# EAGLE board HiveBoard Dimension (EAGLE 9.6.2), part 1 of 2
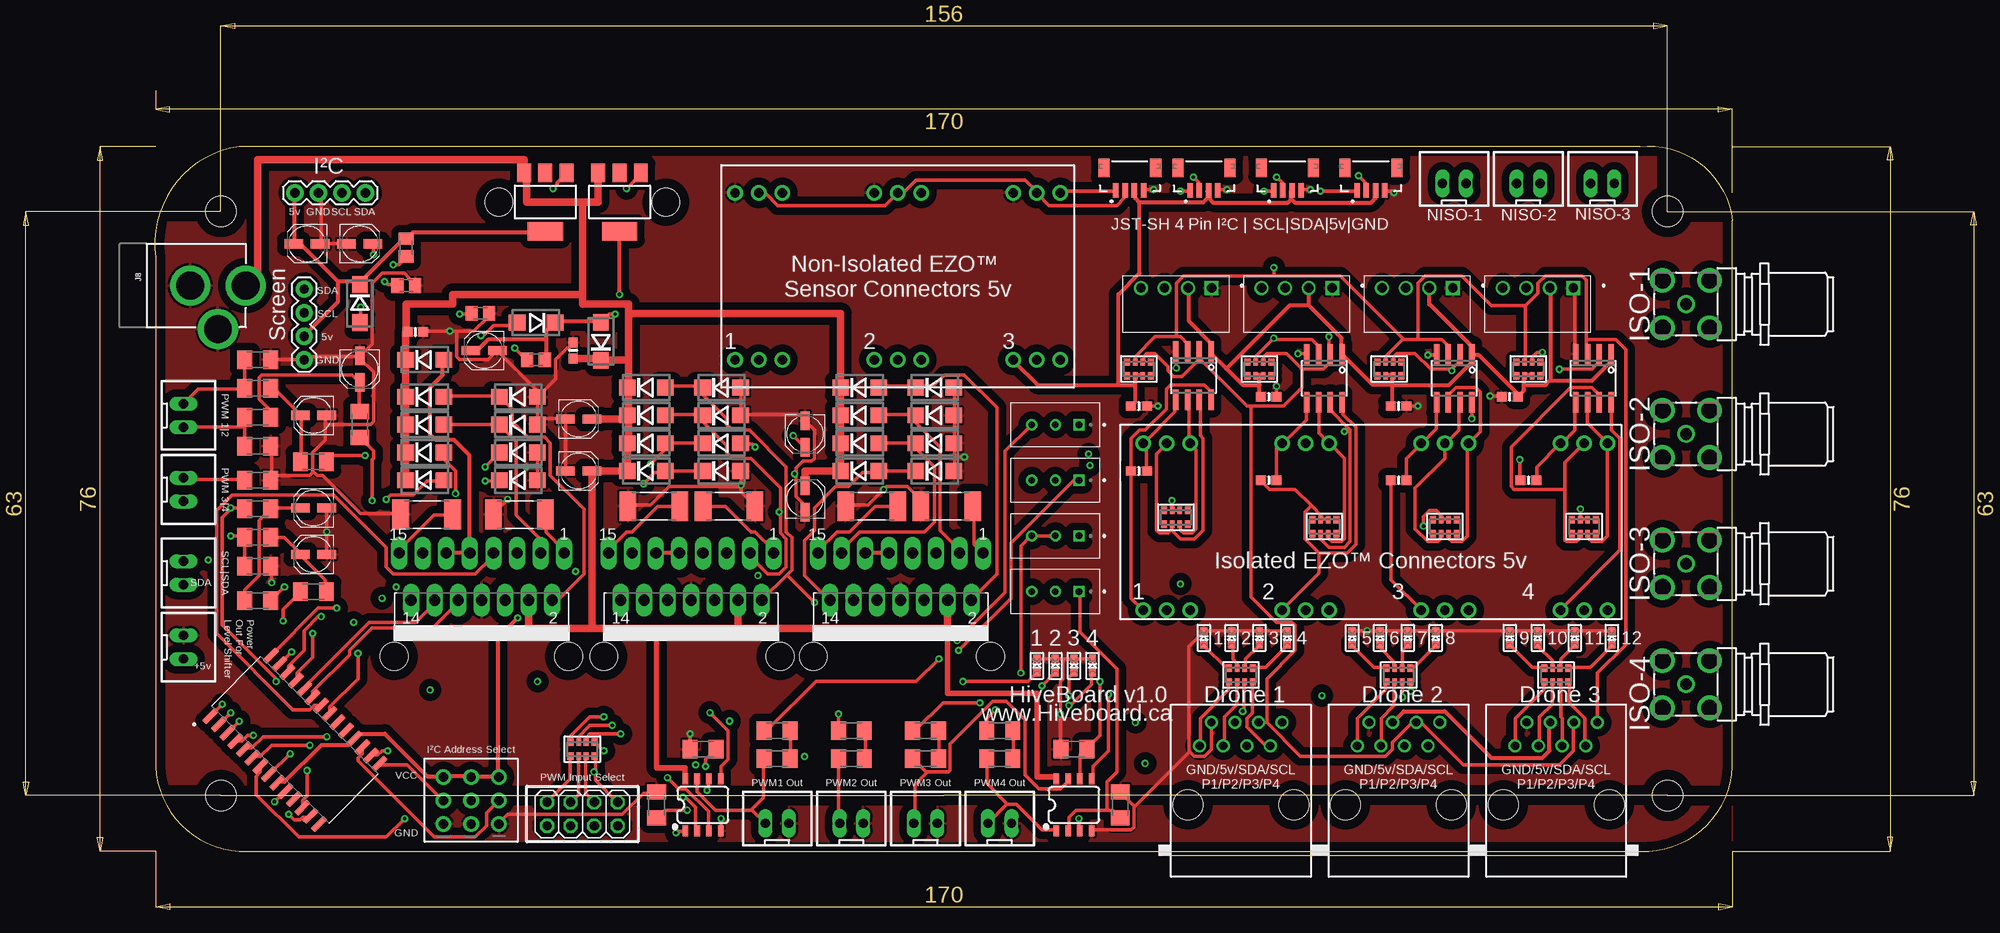
[diagram p0: board, top side]
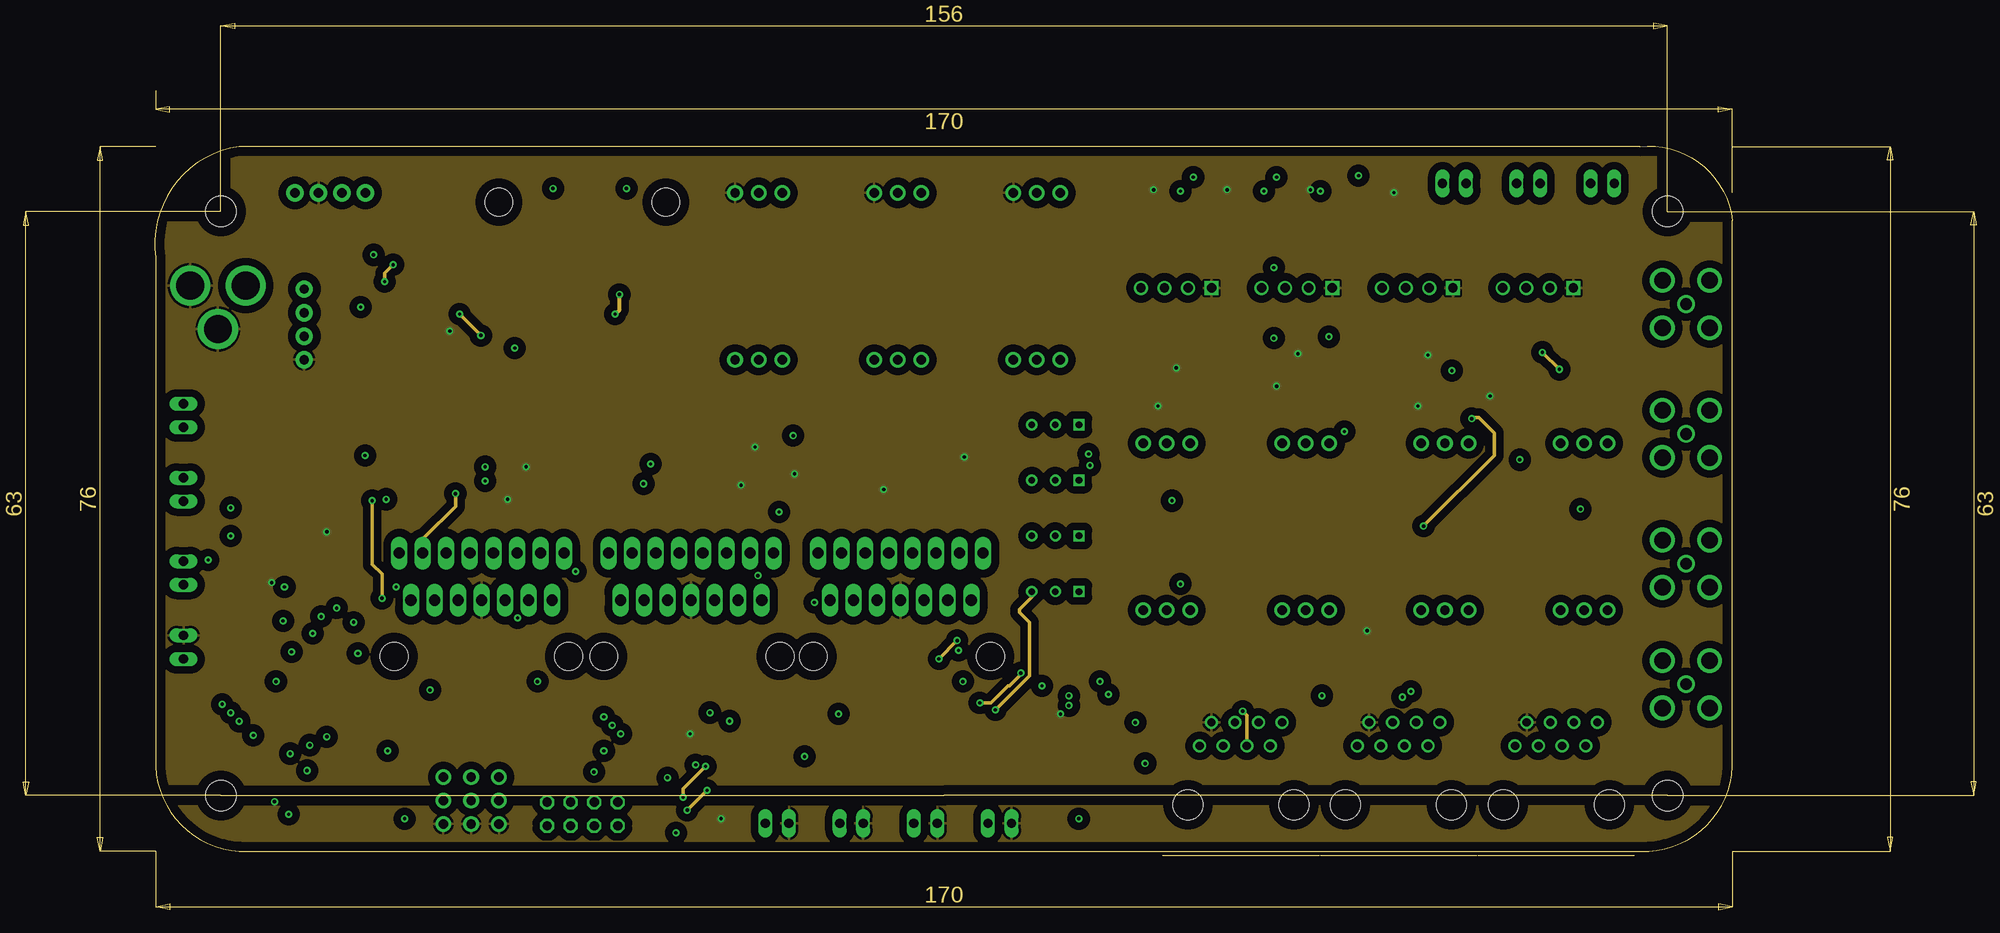
[diagram p1: board, inner layer Route2]
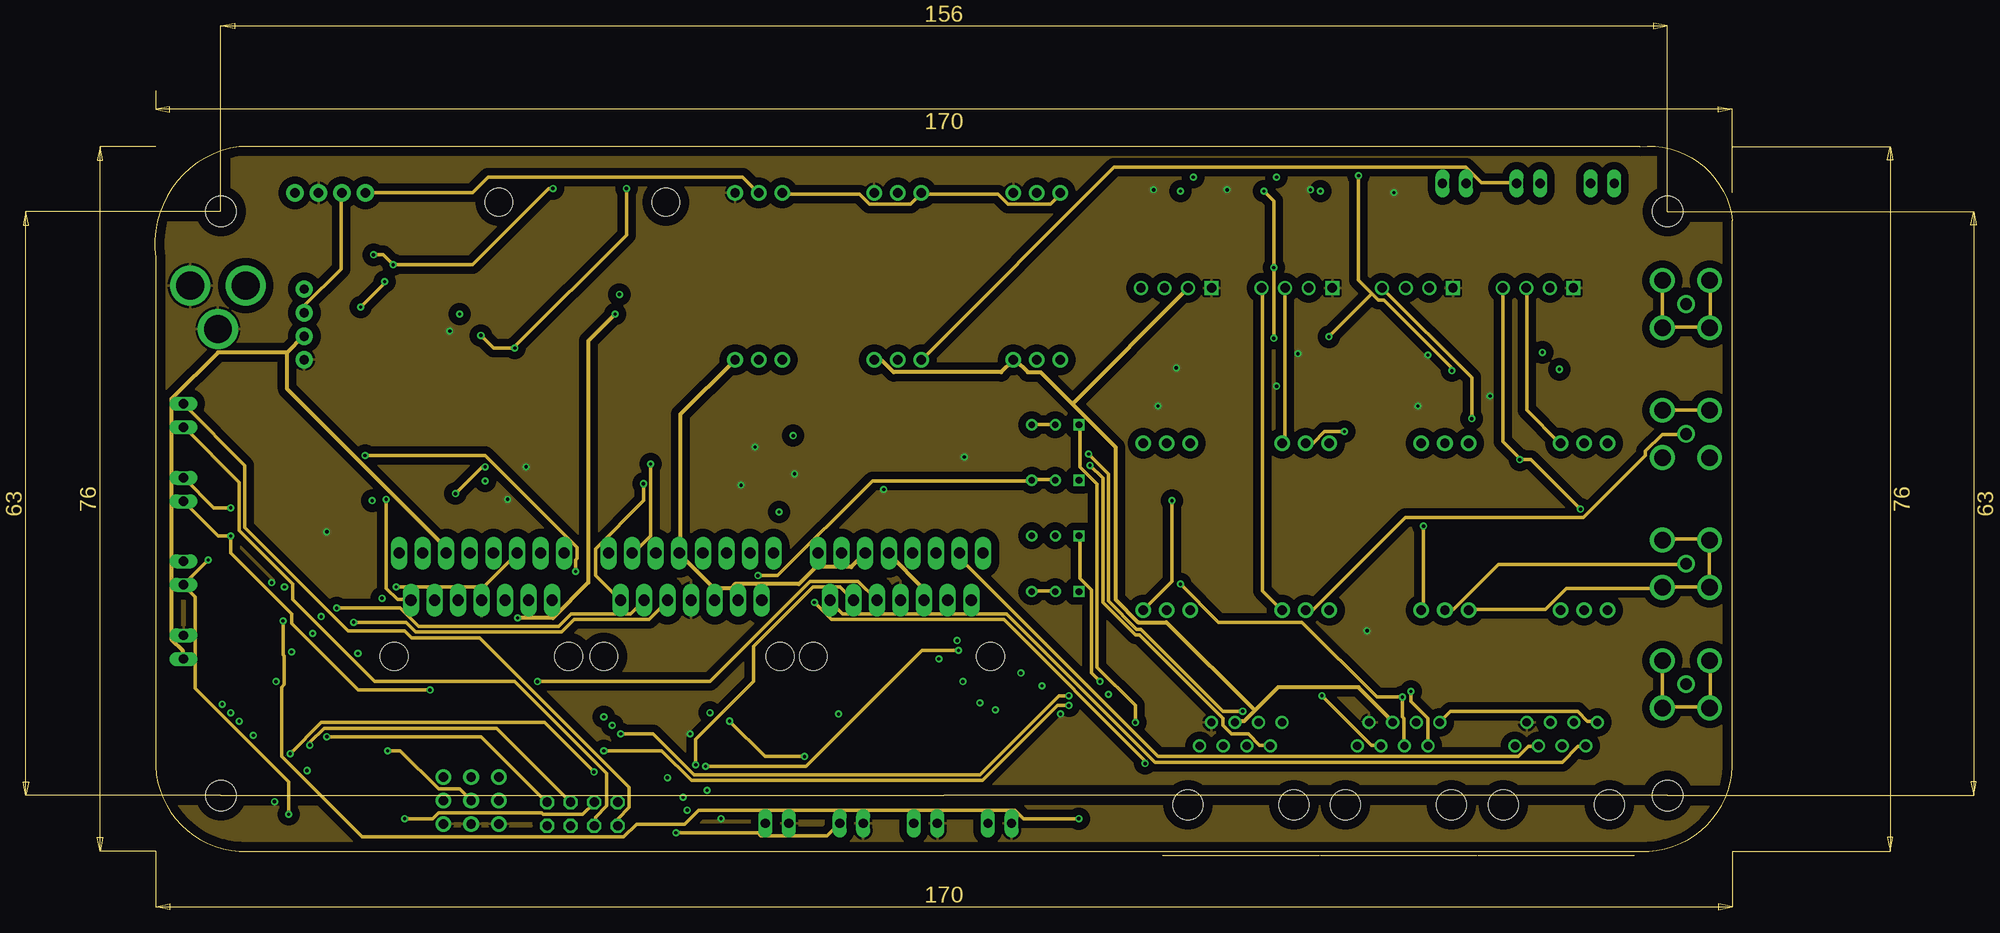
[diagram p2: board, inner layer Route15]
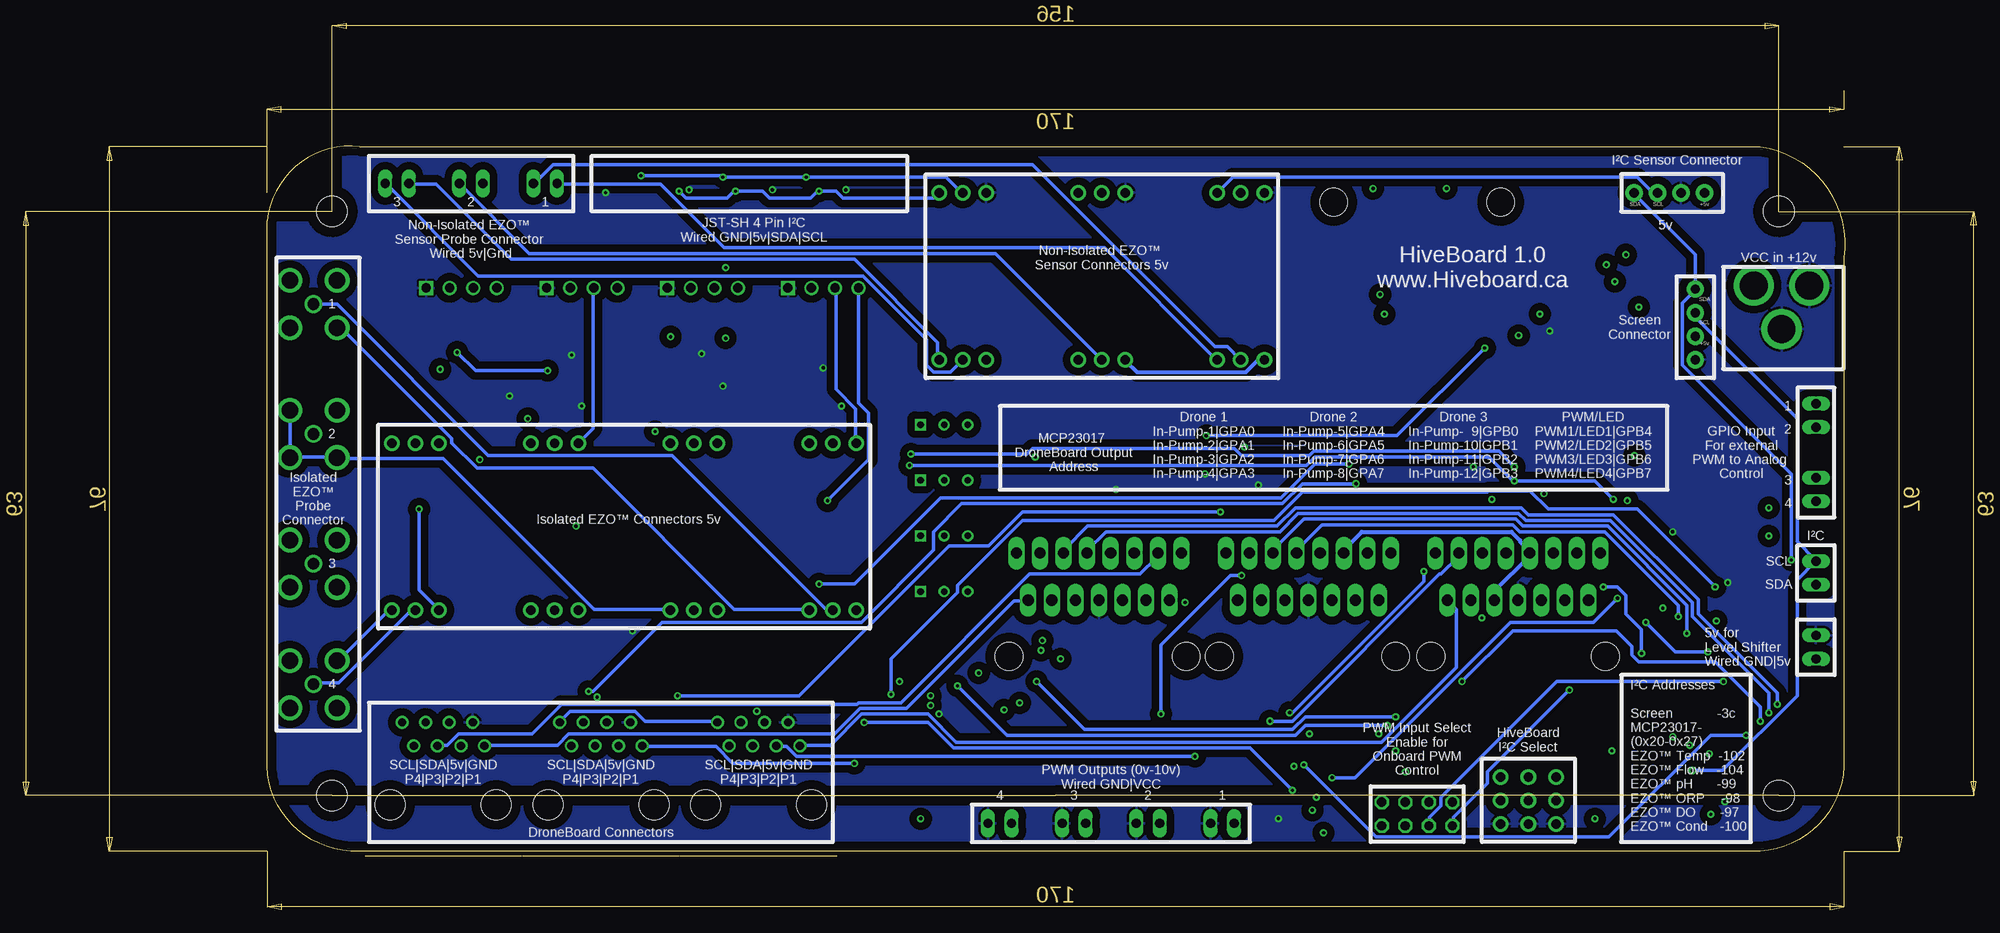
[diagram p3: board, bottom side, seen from below]

Size 170.1 x 76.05 mm. Coordinates in mm from the lower left corner, seen from the top.
Outline: 9.1,0 161.1,0 arc90 170.1,10 170.1,68 arc90 160.1,76 9.1,76 arc90 0.1,64 0.1,10 arc90 9.1,0
Copper layers (1+2*15+16): Top 0.035mm / dielectric 1.5mm / Route2 0.035mm / dielectric 0.15mm / Route15 0.035mm / dielectric 0.2mm / Bottom 0.035mm
Design rules "default *": minimum track width 6mil, minimum drill 0.35mm, track to track 6mil, track to pad 6mil, pad to pad 6mil, via to via 6mil, smd to smd 6mil, copper to edge 40mil, drill to drill 6mil, minimum pad ring 10mil, minimum via ring 8mil, stop-mask expansion 4mil, vias tented up to drill 0mil, thermal gap 10mil
Net classes: 0 default: width 0.356 mm, drill 0.102 mm, clearance 0.254 mm; 1 highpower: width 0.356 mm, drill 0.356 mm; 2 12v: width 0.457 mm, drill 0.102 mm, clearance 0.254 mm; 3 5v: width 0.406 mm, drill 0.102 mm, clearance 0.254 mm; 4 3.3v: width 0.406 mm, drill 0.102 mm, clearance 0.254 mm; 5 i2c: width 0.356 mm, drill 0.102 mm, clearance 0.254 mm; 6 GPIO: width 0.356 mm, drill 0.102 mm, clearance 0.254 mm; 8 New Class: drill 0.102 mm, clearance 0.152 mm
Holes 3 mm at 55.1,70 37.1,70 48.4,21 67.4,21 71,21 90.1,21 25.8,21 44.6,21

## Footprints (pad centres in the part's own frame; a part is rotated, then mirrored left to right if it is on the bottom)
UD-4X5,8_NICHICON = smd 2 x 1: + 1.425,0; - -1.425,0
0603-NO = smd 1.075 x 1: 1 -0.85,0; 2 0.85,0
DO214BA = smd 1.8 x 1.7: A 2.05,0; C -2.05,0
STAND-OFF = hole 3.302: 0,0
SOT223 = smd 1.5 x 2: 1 -2.3,-3.15; 2 0,-3.15; 3 2.3,-3.15 | smd 3.8 x 2: 4 0,3.15
MULTIWATT-15 = drill 1.2 long: 1 -8.89,-7.62; 2 -7.62,-2.54; 3 -6.35,-7.62; 4 -5.08,-2.54; 5 -3.81,-7.62; 6 -2.54,-2.54; 7 -1.27,-7.62; 8 0,-2.54; 9 1.27,-7.62; 10 2.54,-2.54; 11 3.81,-7.62; 12 5.08,-2.54; 13 6.35,-7.62; 14 7.62,-2.54; 15 8.89,-7.62
JST04_1MM_VERT = smd 0.6 x 1.55: 1 -1.478,0.775; 2 -0.478,0.775; 3 0.522,0.775; 4 1.522,0.775 | smd 1.2 x 2: NC1 -2.778,3.2; NC2 2.822,3.2
1X04 = drill 1.016 pad 1.88: 1 0,0; 2 2.54,0; 3 5.08,0; 4 7.62,0
POWER_JACK_PTH = drill 2.997 pad 4.318: GND 0,7.7; GNDBREAK 4.7,10.7; PWR 0,13.7
1X03_ROUND = drill 1 pad 1.676: 1 -2.54,0; 2 0,0; 3 2.54,0
2X04 = drill 1.016 octagon: 1 -3.81,-1.27; 2 -3.81,1.27; 3 -1.27,-1.27; 4 -1.27,1.27; 5 1.27,-1.27; 6 1.27,1.27; 7 3.81,-1.27; 8 3.81,1.27
1X03-CLEANBIG = drill 1.016 pad 1.676: 1 -2.54,0; 2 0,0; 3 2.54,0
CHIPLED_0603 = smd 0.8 x 0.8: A 0,-0.75; C 0,0.75
CONV_RFM-0505S = drill 1 square: 1 -3.85,-1.75 | drill 1: 2 -1.31,-1.75; 3 1.23,-1.75; 4 3.77,-1.75
R2512 = smd 1.8 x 3.2: 1 -2.8,0; 2 2.8,0
M1206 = smd 1.6 x 2: 1 -1.4,0; 2 1.4,0
M0805 = smd 1.3 x 1.6: 1 -0.95,0; 2 0.95,0
TRIM_3296W-1-103 = drill 0.71 square: 1 -2.54,0 | drill 0.71: 2 0,0; 3 2.54,0
RESPACK_4X0603 = smd 0.65 x 0.8: 1 -1.3,-0.75; 4 1.3,-0.75; 5 1.3,0.75; 8 -1.3,0.75 | smd 0.5 x 0.8: 2 -0.4,-0.75; 3 0.4,-0.75; 6 0.4,0.75; 7 -0.4,0.75
SOIC127P1030X265-28N = smd 1.9 x 0.6: 1 -4.605,8.255; 2 -4.605,6.985; 3 -4.605,5.715; 4 -4.605,4.445; 5 -4.605,3.175; 6 -4.605,1.905; 7 -4.605,0.635; 8 -4.605,-0.635; 9 -4.605,-1.905; 10 -4.605,-3.175; 11 -4.605,-4.445; 12 -4.605,-5.715; 13 -4.605,-6.985; 14 -4.605,-8.255; 15 4.605,-8.255; 16 4.605,-6.985; 17 4.605,-5.715; 18 4.605,-4.445; 19 4.605,-3.175; 20 4.605,-1.905; 21 4.605,-0.635; 22 4.605,0.635; 23 4.605,1.905; 24 4.605,3.175; 25 4.605,4.445; 26 4.605,5.715; 27 4.605,6.985; 28 4.605,8.255
SO08 = smd 0.6 x 1.2: 1 -1.905,-2.8; 2 -0.635,-2.8; 3 0.635,-2.8; 4 1.905,-2.8; 5 1.905,2.8; 6 0.635,2.8; 7 -0.635,2.8; 8 -1.905,2.8
JST-XH-02-PACKAGE-LONG-PAD = drill 1.016 long: 1 -1.27,0; 2 1.27,0
SOIC8_150MIL = smd 0.6 x 2.2: 1 -1.905,-2.6; 2 -0.635,-2.6; 3 0.635,-2.6; 4 1.905,-2.6; 5 1.905,2.6; 6 0.635,2.6; 7 -0.635,2.6; 8 -1.905,2.6
RJ45-NO-SHIELD = drill 0.9 pad 1.4: 1 -4.445,6.35; 2 -3.175,8.89; 3 -1.905,6.35; 4 -0.635,8.89; 5 0.635,6.35; 6 1.905,8.89; 7 3.175,6.35; 8 4.445,8.89 | hole 3.251: -5.715,0; 5.715,0
BU-SMA-G = drill 1.27: 1 0,0 | drill 1.778: 2 -2.55,2.55; 3 2.55,2.55; 4 2.55,-2.55; 5 -2.55,-2.55

## Placement (x,y rotation side)
C1  100nF  [UD-4X5,8_NICHICON]  45.7,41 0 top
C1A1  1uf 50v  [UD-4X5,8_NICHICON]  17.1,47 180 top
C1A2  1uf 50v  [UD-4X5,8_NICHICON]  17.1,37 180 top
C1B1  1uf 50v  [UD-4X5,8_NICHICON]  22.1,52 270 top
C1B2  1uf 50v  [UD-4X5,8_NICHICON]  17.1,32 180 top
C2  0.1uF  [0603-NO]  28.1,56 180 top
C3  1uF 50v  [UD-4X5,8_NICHICON]  16.4,65.5 180 top
C4  10uF 35v  [UD-4X5,8_NICHICON]  22.1,65.5 0 top
C5  1uf 50v  [UD-4X5,8_NICHICON]  35.5,54 180 top
C6  0.1uF  [0603-NO]  45.1,54 270 top
C7  100nF  [UD-4X5,8_NICHICON]  45.7,46.6 0 top
C8  10uF 35v  [UD-4X5,8_NICHICON]  70.1,45 270 top
C9  100nF  [UD-4X5,8_NICHICON]  70.1,38 90 top
C10  0.1uF  [0603-NO]  106.1,48 0 top
C11  0.1uF  [0603-NO]  106.1,41 0 top
C12  0.1uF  [0603-NO]  120.1,49 0 top
C13  0.1uF  [0603-NO]  120.1,40 0 top
C14  0.1uF  [0603-NO]  134.1,48 0 top
C15  0.1uF  [0603-NO]  134.1,40 0 top
C16  0.1uF  [0603-NO]  146.1,49 180 top
C17  0.1uF  [0603-NO]  148.1,40 0 top
D1  1N4002  [DO214BA]  22.1,59.05 270 top
D2  1N4002  [DO214BA]  29.1,53 0 top
D3  1N4004  [DO214BA]  29.1,49 0 top
D4  1N4004  [DO214BA]  39.2,49 0 top
D5  1N4004  [DO214BA]  29.1,46 0 top
D6  1N4004  [DO214BA]  39.2,46 0 top
D7  1N4004  [DO214BA]  29.1,43 0 top
D8  1N4004  [DO214BA]  39.2,43 0 top
D9  1N4004  [DO214BA]  29.1,40 0 top
D10  1N4004  [DO214BA]  39.2,40 0 top
D11  1N4004  [DO214BA]  41.1,57 180 top
D12  1N4004  [DO214BA]  48.1,55 90 top
D13  1N4004  [DO214BA]  53,50 0 top
D14  1N4004  [DO214BA]  53,47 0 top
D15  1N4004  [DO214BA]  53,44 0 top
D16  1N4004  [DO214BA]  53,41 0 top
D17  1N4004  [DO214BA]  61.1,50 0 top
D18  1N4004  [DO214BA]  61.1,47 0 top
D19  1N4004  [DO214BA]  61.1,44 0 top
D20  1N4004  [DO214BA]  61.1,41 0 top
D21  1N4004  [DO214BA]  76,50 0 top
D22  1N4004  [DO214BA]  84.1,50 0 top
D23  1N4004  [DO214BA]  76,47 0 top
D24  1N4004  [DO214BA]  84.1,47 0 top
D25  1N4004  [DO214BA]  76,44 0 top
D26  1N4004  [DO214BA]  84.1,44 0 top
D27  1N4004  [DO214BA]  76,41 0 top
D28  1N4004  [DO214BA]  84.1,41 0 top
H1  STAND-OFF  [STAND-OFF]  7.1,69 0 top
H2  STAND-OFF  [STAND-OFF]  7.1,6 0 top
H3  STAND-OFF  [STAND-OFF]  163.1,69 0 top
H4  STAND-OFF  [STAND-OFF]  163.1,6 0 top
IC1  LM317MBSTT3  [SOT223]  42.1,70 180 top
IC2  L298  [MULTIWATT-15]  35.23,24.52 180 top
IC3  LM317MBSTT3  [SOT223]  50.1,70 180 top
IC4  L298  [MULTIWATT-15]  57.82,24.52 180 top
IC5  L298  [MULTIWATT-15]  80.41,24.52 180 top
J1  Vertical Qwiic Connector  [JST04_1MM_VERT]  105.1,70.5 0 top
J2  C2886705  [1X04]  15.1,71 0 top
J3  C2886705  [1X04]  16.1,53 90 top
J5  Vertical Qwiic Connector  [JST04_1MM_VERT]  113.1,70.5 0 top
J6  Vertical Qwiic Connector  [JST04_1MM_VERT]  122.1,70.5 0 top
J7  Vertical Qwiic Connector  [JST04_1MM_VERT]  131.1,70.5 0 top
J8  POWER_JACK  [POWER_JACK_PTH]  -3.9,61 270 top
JP1  [1X03_ROUND]  31.1,5.46 90 top
JP2  [1X03_ROUND]  34.1,5.46 90 top
JP3  [1X03_ROUND]  37.1,5.46 90 top
JP4  [2X04]  46.1,4 0 top
JP5  C2886705  [1X03-CLEANBIG]  65.1,71 180 top
JP6  C2886705  [1X03-CLEANBIG]  65.1,53 0 top
JP7  C2886705  [1X03-CLEANBIG]  80.1,71 180 top
JP8  C2886705  [1X03-CLEANBIG]  80.1,53 0 top
JP9  C2886705  [1X03-CLEANBIG]  95.1,71 180 top
JP10  C2886705  [1X03-CLEANBIG]  95.1,53 0 top
JP12  C2886705  [1X03-CLEANBIG]  109.1,44 180 top
JP13  C2886705  [1X03-CLEANBIG]  109.1,26 0 top
JP14  C2886705  [1X03-CLEANBIG]  124.1,44 180 top
JP15  C2886705  [1X03-CLEANBIG]  124.1,26 0 top
JP16  C2886705  [1X03-CLEANBIG]  139.1,44 180 top
JP17  C2886705  [1X03-CLEANBIG]  139.1,26 0 top
JP18  C2886705  [1X03-CLEANBIG]  154.1,44 180 top
JP19  C2886705  [1X03-CLEANBIG]  154.1,26 0 top
LED1  [CHIPLED_0603]  95.1,20 0 top
LED2  [CHIPLED_0603]  97.1,20 0 top
LED3  [CHIPLED_0603]  99.1,20 0 top
LED4  [CHIPLED_0603]  101.1,20 0 top
LED5  [CHIPLED_0603]  113.1,23 0 top
LED6  [CHIPLED_0603]  116.1,23 0 top
LED7  [CHIPLED_0603]  119.1,23 0 top
LED8  [CHIPLED_0603]  122.1,23 0 top
LED9  [CHIPLED_0603]  129.1,23 0 top
LED10  [CHIPLED_0603]  132.1,23 0 top
LED11  [CHIPLED_0603]  135.1,23 0 top
LED12  [CHIPLED_0603]  138.1,23 0 top
LED13  [CHIPLED_0603]  146.1,23 0 top
LED14  [CHIPLED_0603]  149.1,23 0 top
LED15  [CHIPLED_0603]  153.1,23 0 top
LED16  [CHIPLED_0603]  157.1,23 0 top
PS1  RFM-0505S  [CONV_RFM-0505S]  110.1,59 180 top
PS2  RFM-0505S  [CONV_RFM-0505S]  123.1,59 180 top
PS3  RFM-0505S  [CONV_RFM-0505S]  136.1,59 180 top
PS4  RFM-0505S  [CONV_RFM-0505S]  149.1,59 180 top
R1  0,5 x 2W  [R2512]  39.3,36.3 0 top
R1A1  100kΩ  [M1206]  11.1,49.91 180 top
R1A2  100kΩ  [M1206]  11.1,36.93 180 top
R1B1  100kΩ  [M1206]  11.1,46.81 0 top
R1B2  100kΩ  [M1206]  11.1,33.86 0 top
R2  240Ω  [M0805]  27.1,65.1 90 top
R2A1  100kΩ  [M1206]  54.1,5 270 top
R2A2  100kΩ  [M1206]  99.1,11 0 top
R2B1  100kΩ  [M1206]  59.1,11 180 top
R2B2  100kΩ  [M1206]  104.1,5 90 top
R3  240Ω  [M0805]  41.1,53 0 top
R3-1A1  3296W-1-103  [TRIM_3296W-1-103]  97.1,46 180 top
R3-1A2  3296W-1-103  [TRIM_3296W-1-103]  97.1,34 180 top
R3-1B1  3296W-1-103  [TRIM_3296W-1-103]  97.1,40 180 top
R3-1B2  3296W-1-103  [TRIM_3296W-1-103]  97.1,28 180 top
R3-2A1  180KΩ  [M1206]  67.1,13 0 top
R3-2A2  180KΩ  [M1206]  83.1,13 0 top
R3-2B1  180KΩ  [M1206]  75.1,13 0 top
R3-2B2  180KΩ  [M1206]  91.1,13 0 top
R3-3A1  15kΩ  [M1206]  67.1,10 180 top
R3-3A2  15kΩ  [M1206]  83.1,10 180 top
R3-3B1  15kΩ  [M1206]  75.1,10 180 top
R3-3B2  15kΩ  [M1206]  91.1,10 180 top
R4  720Ω  [M0805]  27.1,61 180 top
R4A1  75kΩ  [M1206]  11.1,27 0 top
R4A2  75kΩ  [M1206]  17.1,42 0 top
R4B1  75kΩ  [M1206]  22.1,46 270 top
R4B2  75kΩ  [M1206]  17.1,28 180 top
R5  394Ω  [M0805]  35.1,58 180 top
R5A1  10kΩ  [M1206]  11.1,53 0 top
R5A2  10kΩ  [M1206]  11.1,40 0 top
R5B1  10kΩ  [M1206]  11.1,43.69 0 top
R5B2  10kΩ  [M1206]  11.1,30.73 0 top
R6  0,5 x 2W  [R2512]  29.3,36.3 0 top
R7  10kΩ  [RESPACK_4X0603]  46.1,11 0 top
R8  0,5 x 2W  [R2512]  53.8,37.2 0 top
R9  0,5 x 2W  [R2512]  61.9,37.2 180 top
R10  0,5 x 2W  [R2512]  77.3,37.2 0 top
R11  0,5 x 2W  [R2512]  85.4,37.2 0 top
R12  10KΩ  [RESPACK_4X0603]  106.1,52 180 top
R13  10KΩ  [RESPACK_4X0603]  119.1,52 180 top
R14  10KΩ  [RESPACK_4X0603]  110.1,36 0 top
R15  10kΩ  [RESPACK_4X0603]  117.1,19 0 top
R16  10KΩ  [RESPACK_4X0603]  126.1,35 0 top
R17  10KΩ  [RESPACK_4X0603]  133.1,52 180 top
R18  10KΩ  [RESPACK_4X0603]  139.1,35 0 top
R19  10kΩ  [RESPACK_4X0603]  134.1,19 0 top
R20  10KΩ  [RESPACK_4X0603]  148.1,52 180 top
R21  10KΩ  [RESPACK_4X0603]  154.1,35 0 top
R22  10kΩ  [RESPACK_4X0603]  151.1,19 0 top
U1  MCP23017-E/SO  [SOIC127P1030X265-28N]  15.1,12 45 top
U2  LM358  [SO08]  59.1,5 0 top
U3  LM358  [SO08]  99.1,5 0 top
X1  PWM-IN  [JST-XH-02-PACKAGE-LONG-PAD]  3.1,47 270 top
X2  PWM-IN  [JST-XH-02-PACKAGE-LONG-PAD]  3.1,39 270 top
X3  jst-xh-2  [JST-XH-02-PACKAGE-LONG-PAD]  3.1,30 270 top
X4  PWM1  [JST-XH-02-PACKAGE-LONG-PAD]  67.1,3 0 top
X5  PWM2  [JST-XH-02-PACKAGE-LONG-PAD]  75.1,3 0 top
X6  PWM3  [JST-XH-02-PACKAGE-LONG-PAD]  83.1,3 0 top
X7  PWM2  [JST-XH-02-PACKAGE-LONG-PAD]  91.1,3 0 top
X8  ISO154X  [SOIC8_150MIL]  111.99,51.3 180 top
X9  RJ45-6L-B  [RJ45-NO-SHIELD]  117.1,5 0 top
X10  ISO154X  [SOIC8_150MIL]  126.1,51 180 top
X11  jst-xh-2  [JST-XH-02-PACKAGE-LONG-PAD]  140.1,72 0 top
X12  ISO154X  [SOIC8_150MIL]  140.1,51 180 top
X13  RJ45-6L-B  [RJ45-NO-SHIELD]  134.1,5 0 top
X14  jst-xh-2  [JST-XH-02-PACKAGE-LONG-PAD]  148.1,72 0 top
X15  ISO154X  [SOIC8_150MIL]  155.1,51 180 top
X16  RJ45-6L-B  [RJ45-NO-SHIELD]  151.1,5 0 top
X17  jst-xh-2  [JST-XH-02-PACKAGE-LONG-PAD]  156.1,72 0 top
X18  BU-SMA-G  [BU-SMA-G]  165.1,59 0 top
X19  BU-SMA-G  [BU-SMA-G]  165.1,45 0 top
X20  BU-SMA-G  [BU-SMA-G]  165.1,31 0 top
X21  BU-SMA-G  [BU-SMA-G]  165.1,18 0 top
X22  jst-xh-2  [JST-XH-02-PACKAGE-LONG-PAD]  3.1,22 270 top

## Library data of the parts
C1 C1A1 C1A2 C1B1 C1B2 C3-C5 C7-C9 = rcl; SPICEPREFIX: C
C2 C6 C10-C17 JP1-JP3 LED1-LED16 R7 R12-R22 = microbuilder
D1-D28 = diode
H1-H4 = SparkFun-Hardware
IC1 IC3 = v-reg; PARTNUMBER: LM317M
IC2 IC4 IC5 = st-microelectronics; MPN: L298N; OC_FARNELL: 1589425; OC_NEWARK: 32M1527
J1 J5-J7 = SparkFun-Connectors; PROD_ID: CONN-14483
J2 J3 = SparkFun-Connectors
J8 = SparkFun-Connectors; PROD_ID: CONN-08197
JP4 = pinhead
JP5-JP10 JP12-JP19 R1 R1A1 R1A2 R1B1 R1B2 R2A1 R2A2 R2B1 R2B2 R3-2A1 R3-2A2 R3-2B1 R3-2B2 R3-3A1 R3-3A2 R3-3B1 R3-3B2 R4A1 R4A2 R4B1 R4B2 R5A1 R5A2 R5B1 R5B2 R8 R10 R11 = adafruit
PS1-PS4 = RFM-0505S; AVAILABILITY: In Stock; DESCRIPTION: 1W DC/DC-Converter 'ECONOLINE' SIP4 1kV unreg; MF: Recom Power; MP: RFM-0505S; PACKAGE: SIP-4 Recom Power; PRICE: None; PURCHASE-URL: https://pricing.snapeda.com/search/part/RFM-0505S/?ref=eda
R2-R5 = resistor
R3-1A1 R3-1A2 R3-1B1 R3-1B2 = 3296W-1-103; AVAILABILITY: In Stock; DESCRIPTION: 10 kOhms 0.5W, 1/2W PC Pins Through Hole Trimmer Potentiometer Cermet 25.0 Turn Top Adjustment; MF: Bourns; MP: 3296W-1-103; PACKAGE: SOT-23-5 Bourns; PRICE: None; PURCHASE-URL: https://pricing.snapeda.com/search/part/3296W-1-103/?ref=eda
R6 R9 = adafruit; JLCPCB: C500611
U1 = MCP23017-E_SO; AVAILABILITY: In Stock; DESCRIPTION: I/O Expander 16 I²C 1.7 MHz 28-SOIC; MF: Microchip; MP: MCP23017-E/SO; PACKAGE: SOIC-28 Microchip; PRICE: None; PURCHASE-URL: https://pricing.snapeda.com/search/part/MCP23017-E/SO/?ref=eda
U2 U3 = SparkFun-IC-Amplifiers
X1-X7 X17 X22 = Rembrandt Electronics - JST XH Connectors v1-0
X8 X10 X12 X15 = adafruit_power
X9 X13 X16 = con-tycoelectronics; MPN: RJ45-6L-B; OC_FARNELL: unknown; OC_NEWARK: 16R6090
X11 = Rembrandt Electronics - JST XH Connectors v1-0; E4: NISO-1
X14 = Rembrandt Electronics - JST XH Connectors v1-0; T: NISO-2
X18-X21 = con-coax; OC_FARNELL: unknown; OC_NEWARK: unknown

## Nets
+3.3V [3.3v]: C5.+ D11.C D12.A IC3.4 JP1.3 JP2.3 JP3.3 R3.2 U1.9 U1.18
+5V [5v]: C3.+ C10.1 C12.1 C14.1 C16.1 D1.C D2.A IC1.4 IC2.6 IC2.9 IC2.11 IC4.6 IC4.9 IC4.11 IC5.6 IC5.9 IC5.11 J1.3 J2.1 J3.2 J5.3 J6.3 J7.3 JP6.1 JP8.1 JP10.1 PS1.2 PS2.2 PS3.2 PS4.2 R2.2 R12.6 R12.7 R13.6 R13.7 R17.6 R17.7 R20.6 R20.7 X8.1 X9.4 X10.1 X12.1 X13.4 X15.1 X16.4 X22.2
+12V [12v]: C1.+ C2.2 C6.2 C7.+ C9.+ D2.C D3.C D5.C D7.C D9.C D12.C D13.C D14.C D15.C D16.C D21.C D23.C D25.C D27.C IC1.3 IC2.4 IC3.3 IC4.4 IC5.4 J8.PWR U2.8 U3.8
GND: C1.- C1A1.- C1A2.- C1B1.- C1B2.- C2.1 C3.- C4.- C5.- C6.1 C7.- C8.- C9.- C10.2 C12.2 C14.2 C16.2 D4.A D6.A D8.A D10.A D17.A D18.A D19.A D20.A D22.A D24.A D26.A D28.A IC2.8 IC4.8 IC5.8 J1.4 J2.2 J3.1 J5.4 J6.4 J7.4 J8.GND J8.GNDBREAK JP1.1 JP2.1 JP3.1 JP5.3 JP7.3 JP9.3 LED1.C LED2.C LED3.C LED4.C LED5.C LED6.C LED7.C LED8.C LED9.C LED10.C LED11.C LED12.C LED13.C LED14.C LED15.C LED16.C PS1.1 PS2.1 PS3.1 PS4.1 R1.1 R2A1.1 R2A2.1 R2B1.2 R2B2.2 R4.1 R5.1 R5A1.2 R5A2.2 R5B1.2 R5B2.2 R6.1 R8.1 R9.1 R10.1 R11.1 U1.10 U2.4 U3.4 X4.2 X5.2 X6.2 X7.2 X8.4 X9.2 X10.4 X12.4 X13.2 X15.4 X16.2 X22.1
IN-PUMP-1: IC2.5 U1.21
IN-PUMP-2: IC2.7 U1.22
IN-PUMP-3: IC2.10 U1.23
IN-PUMP-4: IC2.12 U1.24
IN-PUMP-5 [GPIO]: IC4.5 U1.25
IN-PUMP-6 [GPIO]: IC4.7 U1.26
IN-PUMP-7 [GPIO]: IC4.10 U1.27
IN-PUMP-8 [GPIO]: IC4.12 U1.28
IN-PUMP-9 [GPIO]: IC5.5 U1.1
IN-PUMP-10 [GPIO]: IC5.7 U1.2
IN-PUMP-11 [GPIO]: IC5.10 U1.3
IN-PUMP-12 [GPIO]: IC5.12 U1.4
IN-PWM-1: JP4.7 R1A1.2 R5A1.1 X1.1
IN-PWM-2: JP4.5 R1B1.1 R5B1.1 X1.2
IN-PWM-3: JP4.3 R1A2.2 R5A2.1 X2.1
IN-PWM-4: JP4.1 R1B2.1 R5B2.1 X2.2
ISO-1-5V: C11.1 JP13.1 PS1.4 R14.6 R14.7 X8.8
ISO-2-5V: C13.1 JP15.1 PS2.4 R16.6 R16.7 X10.8
ISO-3-5V: C15.1 JP17.1 PS3.4 R18.6 R18.7 X12.8
ISO-4-5V: C17.1 JP19.1 PS4.4 R21.6 R21.7 X15.8
ISO-GND-1: C11.2 JP12.3 PS1.3 X8.5
ISO-GND-2: C13.2 JP14.3 PS2.3 X10.5
ISO-GND-3: C15.2 JP16.3 PS3.3 X12.5
ISO-GND-4: C17.2 JP18.3 PS4.3 X15.5
ISO-PRB-1+: JP13.2 X18.1
ISO-PRB-1GND: JP13.3 X18.2 X18.3 X18.4 X18.5
ISO-PRB-2+: JP15.2 X19.1
ISO-PRB-2GND: JP15.3 X19.2 X19.3 X19.4 X19.5
ISO-PRB-3+: JP17.2 X20.1
ISO-PRB-3GND: JP17.3 X20.2 X20.3 X20.4 X20.5
ISO-PRB-4+: JP19.2 X21.1
ISO-PRB-4GND: JP19.3 X21.2 X21.3 X21.4 X21.5
LED1: JP4.2 R7.1 U1.5
LED2: JP4.4 R7.2 U1.6
LED3: JP4.6 R7.3 U1.7
LED4: JP4.8 R7.4 U1.8
N$1: IC4.1 R9.2
N$2: IC4.15 R8.2
N$3: IC5.1 R11.2
N$4: IC5.15 R10.2
N$5: C8.+ D11.A IC3.1 R3.1 R5.2
N$6: R2A1.2 R3-1A1.1 U2.6
N$7: LED1.A R7.8
N$8: R2B1.1 R3-1B1.1 U2.2
N$9: IC2.1 R1.2
N$10: IC2.15 R6.2
N$11: C4.+ D1.A IC1.1 R2.1 R4.2
N$13: LED2.A R7.7
N$17: R3-1B1.2 R3-1B1.3 R3-2B1.1
N$18: R3-2B1.2 R3-3B1.1
N$19: R3-1A1.2 R3-1A1.3 R3-2A1.1
N$20: R3-2A1.2 R3-3A1.1
N$21: C1A1.+ R1A1.1 R4A2.1
N$22: C1B1.+ R1B1.2 R4B1.1
N$23: LED13.A R22.8
N$24: LED14.A R22.7
N$25: R4A2.2 U2.5
N$26: R4B1.2 U2.3
N$27: R3-1B2.2 R3-1B2.3 R3-2B2.1
N$28: LED15.A R22.6
N$29: LED16.A R22.5
N$30: LED8.A R15.5
N$39: LED7.A R15.6
N$41: LED6.A R15.7
N$43: LED5.A R15.8
N$44: LED9.A R19.8
N$45: LED10.A R19.7
N$46: LED11.A R19.6
N$47: LED12.A R19.5
N$48: LED3.A R7.6
N$49: LED4.A R7.5
N$50: R3-2B2.2 R3-3B2.1
N$51: R3-1A2.2 R3-1A2.3 R3-2A2.1
N$52: R3-2A2.2 R3-3A2.1
N$53: C1A2.+ R1A2.1 R4A1.1
N$54: C1B2.+ R1B2.2 R4B2.1
N$55: R2A2.2 R3-1A2.1 U3.6
N$56: R2B2.1 R3-1B2.1 U3.2
N$57: R4A1.2 U3.5
N$58: R4B2.2 U3.3
N$74: JP1.2 U1.15
N$75: JP2.2 U1.16
N$76: JP3.2 U1.17
NISO-PRB-1+: JP6.2 X11.2
NISO-PRB-1GND: JP6.3 X11.1
NISO-PRB-2+: JP8.2 X14.2
NISO-PRB-2GND: JP8.3 X14.1
NISO-PRB-3+: JP10.2 X17.2
NISO-PRB-3GND: JP10.3 X17.1
OUT-PUMP-1 [highpower]: D3.A D4.C IC2.2 R15.1 X9.1
OUT-PUMP-2 [highpower]: D5.A D6.C IC2.3 R15.2 X9.3
OUT-PUMP-3 [highpower]: D7.A D8.C IC2.13 R15.3 X9.5
OUT-PUMP-4 [highpower]: D9.A D10.C IC2.14 R15.4 X9.7
OUT-PUMP-5 [highpower]: D13.A D17.C IC4.2 R19.1 X13.1
OUT-PUMP-6 [highpower]: D14.A D18.C IC4.3 R19.2 X13.3
OUT-PUMP-7 [highpower]: D15.A D19.C IC4.13 R19.3 X13.5
OUT-PUMP-8 [highpower]: D16.A D20.C IC4.14 R19.4 X13.7
OUT-PUMP-9 [highpower]: D21.A D22.C IC5.2 R22.1 X16.1
OUT-PUMP-10 [highpower]: D23.A D24.C IC5.3 R22.2 X16.3
OUT-PUMP-11 [highpower]: D25.A D26.C IC5.13 R22.3 X16.5
OUT-PUMP-12: D27.A D28.C IC5.14 R22.4 X16.7
PWM-OUT-1: R3-3A1.2 U2.7 X4.1
PWM-OUT-2: R3-3B1.2 U2.1 X5.1
PWM-OUT-3: R3-3A2.2 U3.7 X6.1
PWM-OUT-4: R3-3B2.2 U3.1 X7.1
SCL [i2c]: J1.1 J2.3 J3.3 J5.1 J6.1 J7.1 JP5.1 JP7.1 JP9.1 R12.3 R13.3 R17.3 R20.3 U1.12 X3.1 X8.3 X9.8 X10.3 X12.3 X13.8 X15.3 X16.8
SCL2: JP12.1 R14.3 X8.6
SCL3: JP14.1 R16.3 X10.6
SCL4: JP16.1 R18.3 X12.6
SCL5: JP18.1 R21.3 X15.6
SDA [i2c]: J1.2 J2.4 J3.4 J5.2 J6.2 J7.2 JP5.2 JP7.2 JP9.2 R12.2 R13.2 R17.2 R20.2 U1.13 X3.2 X8.2 X9.6 X10.2 X12.2 X13.6 X15.2 X16.6
SDA2: JP12.2 R14.2 X8.7
SDA3: JP14.2 R16.2 X10.7
SDA4: JP16.2 R18.2 X12.7
SDA5: JP18.2 R21.2 X15.7